# EAGLE board button_breakout_v1.1 (EAGLE 9.6.2)
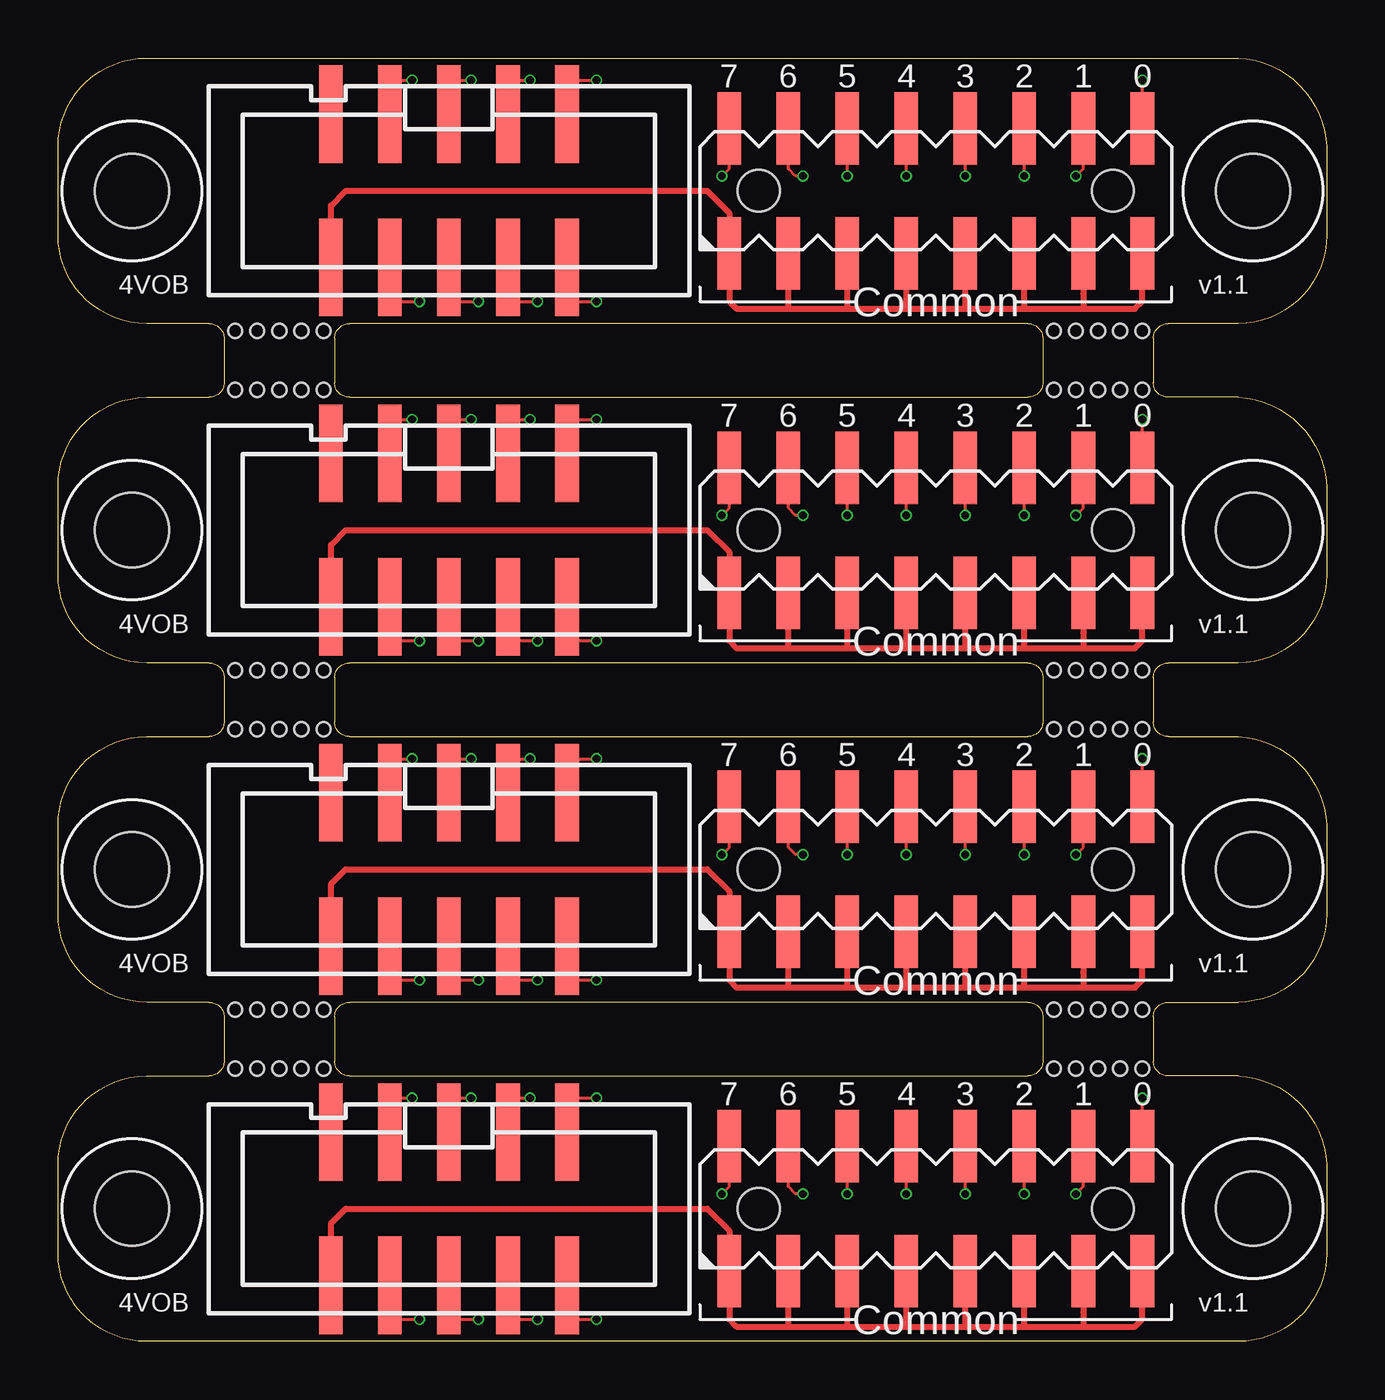
[diagram p0: board, top side]
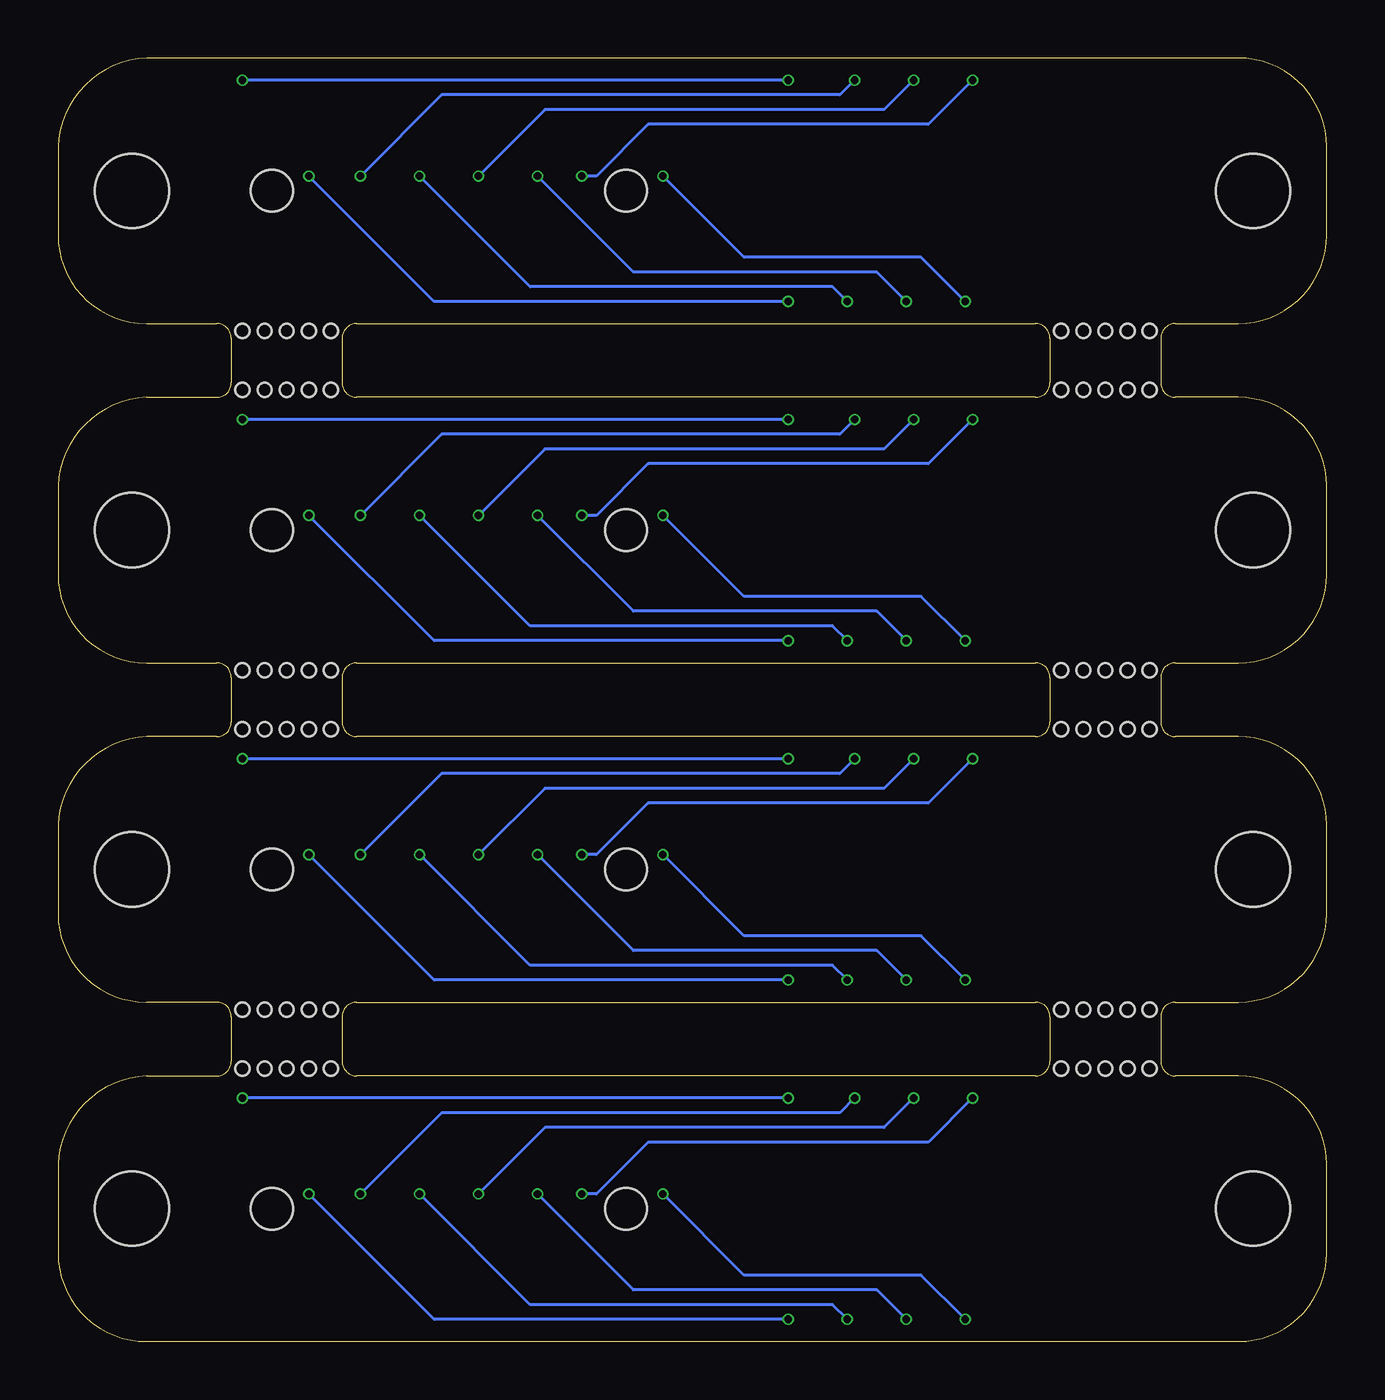
[diagram p1: board, bottom side, seen from below]

Size 54.61 x 55.24 mm. Coordinates in mm from the lower left corner, seen from the top.
Outline: 0,7.62 arc-90 3.81,11.43 6.51,11.43 arc90 7.14,12.06 7.14,13.97 arc90 6.51,14.61 3.81,14.61 arc-90 0,18.42 0,22.23 arc-90 3.81,26.04 6.51,26.04 arc90 7.14,26.67 7.14,28.58 arc90 6.51,29.21 3.81,29.21 arc-90 0,33.02 0,36.83 arc-90 3.81,40.64 6.51,40.64 arc90 7.14,41.27 7.14,43.18 arc90 6.51,43.81 3.81,43.81 arc-90 0,47.62 0,51.43 arc-90 3.81,55.24 50.8,55.24 arc-85 54.61,51.43 54.61,47.62 arc-90 50.8,43.81 47.78,43.81 arc90 47.15,43.18 47.15,41.27 arc90 47.78,40.64 50.8,40.64 arc-85 54.61,36.83 54.61,33.02 arc-90 50.8,29.21 47.78,29.21 arc90 47.15,28.58 47.15,26.67 arc90 47.78,26.04 50.8,26.04 arc-85 54.61,22.23 54.61,18.42 arc-90 50.8,14.61 47.78,14.61 arc90 47.15,13.97 47.15,12.06 arc90 47.78,11.43 50.8,11.43 arc-85 54.61,7.62 54.61,3.81 arc-90 50.8,0 3.81,0 arc-90 0,3.81 0,7.62
Outline: 42.39,12.06 arc-90 41.75,11.43 12.54,11.43 arc-90 11.91,12.06 11.91,13.97 arc-90 12.54,14.61 41.75,14.61 arc-90 42.39,13.97 42.39,12.06
Outline: 42.39,26.67 arc-90 41.75,26.04 12.54,26.04 arc-90 11.91,26.67 11.91,28.58 arc-90 12.54,29.21 41.75,29.21 arc-90 42.39,28.58 42.39,26.67
Outline: 42.39,41.27 arc-90 41.75,40.64 12.54,40.64 arc-90 11.91,41.27 11.91,43.18 arc-90 12.54,43.81 41.75,43.81 arc-90 42.39,43.18 42.39,41.27
Copper layers (1*16): Top 0.035mm / dielectric 1.6mm / Bottom 0.035mm
Design rules "jlcpcb-2layers": minimum track width 5mil, minimum drill 0.3mm, track to track 5mil, track to pad 5mil, pad to pad 5mil, via to via 5mil, smd to smd 5mil, copper to edge 0.2mm, drill to drill 6mil, minimum pad ring 10mil, minimum via ring 3mil, stop-mask expansion 4mil, vias tented up to drill 0mil, thermal gap 10mil
Holes 3.2 mm at 3.17,5.71 51.44,5.71 3.17,20.32 51.44,20.32 3.17,34.92 51.44,34.92 3.17,49.53 51.44,49.53
Holes 0.6 mm at 46.67,11.75 45.72,11.75 44.77,11.75 43.82,11.75 42.86,11.75 42.86,14.29 43.82,14.29 44.77,14.29 45.72,14.29 46.67,14.29 11.43,11.75 10.48,11.75 9.53,11.75 8.57,11.75 7.62,11.75 7.62,14.29 8.57,14.29 9.53,14.29 10.48,14.29 11.43,14.29 46.67,26.35 45.72,26.35 44.77,26.35 43.82,26.35 42.86,26.35 42.86,28.89 43.82,28.89 44.77,28.89 45.72,28.89 46.67,28.89 11.43,26.35 10.48,26.35 9.53,26.35 8.57,26.35 7.62,26.35 7.62,28.89 8.57,28.89 9.53,28.89 10.48,28.89 11.43,28.89 46.67,40.96 45.72,40.96 44.77,40.96 43.82,40.96 42.86,40.96 42.86,43.5 43.82,43.5 44.77,43.5 45.72,43.5 46.67,43.5 11.43,40.96 10.48,40.96 9.53,40.96 8.57,40.96 7.62,40.96 7.62,43.5 8.57,43.5 9.53,43.5 10.48,43.5 11.43,43.5

## Footprints (pad centres in the part's own frame; a part is rotated, then mirrored left to right if it is on the bottom)
CONN-IDC10P-SMD = smd 1.02 x 4.2: P$1 -5.08,-3.3; P$2 -5.08,3.3; P$3 -2.54,-3.3; P$4 -2.54,3.3; P$5 0,-3.3; P$6 0,3.3; P$7 2.54,-3.3; P$8 2.54,3.3; P$9 5.08,-3.3; P$10 5.08,3.3
MA08-2-SMDJ = smd 1.02 x 3.12: P$1 -8.89,-2.69; P$2 -8.89,2.69; P$3 -6.35,-2.69; P$4 -6.35,2.69; P$5 -3.81,-2.69; P$6 -3.81,2.69; P$7 -1.27,-2.69; P$8 -1.27,2.69; P$9 1.27,-2.69; P$10 1.27,2.69; P$11 3.81,-2.69; P$12 3.81,2.69; P$13 6.35,-2.69; P$14 6.35,2.69; P$15 8.89,-2.69; P$16 8.89,2.69 | hole 1.8: -7.62,0; 7.62,0

## Placement (x,y rotation side)
IDC  CONN-IDC-10PSMD  [CONN-IDC10P-SMD]  16.83,5.71 180 top
IDC1  CONN-IDC-10PSMD  [CONN-IDC10P-SMD]  16.83,20.32 180 top
IDC2  CONN-IDC-10PSMD  [CONN-IDC10P-SMD]  16.83,34.92 180 top
IDC3  CONN-IDC-10PSMD  [CONN-IDC10P-SMD]  16.83,49.53 180 top
X1  [MA08-2-SMDJ]  37.78,5.71 0 top
X2  [MA08-2-SMDJ]  37.78,20.32 0 top
X3  [MA08-2-SMDJ]  37.78,34.92 0 top
X4  [MA08-2-SMDJ]  37.78,49.53 0 top

## Library data of the parts
IDC IDC1-IDC3 X1-X4 = joakim

## Nets
COL0: IDC.P$1 X1.P$16
COL1: IDC.P$2 X1.P$14
COL2: IDC.P$3 X1.P$12
COL3: IDC.P$4 X1.P$10
COL4: IDC.P$5 X1.P$8
COL5: IDC.P$6 X1.P$6
COL6: IDC.P$7 X1.P$4
COL7: IDC.P$8 X1.P$2
COL8: IDC1.P$2 X2.P$14
COL9: IDC1.P$3 X2.P$12
COL10: IDC1.P$4 X2.P$10
COL11: IDC1.P$5 X2.P$8
COL12: IDC1.P$6 X2.P$6
COL13: IDC1.P$7 X2.P$4
COL14: IDC1.P$8 X2.P$2
COL15: IDC1.P$1 X2.P$16
COL16: IDC2.P$2 X3.P$14
COL17: IDC2.P$3 X3.P$12
COL18: IDC2.P$4 X3.P$10
COL19: IDC2.P$5 X3.P$8
COL20: IDC2.P$6 X3.P$6
COL21: IDC2.P$7 X3.P$4
COL22: IDC2.P$8 X3.P$2
COL23: IDC2.P$1 X3.P$16
COL24: IDC3.P$2 X4.P$14
COL25: IDC3.P$3 X4.P$12
COL26: IDC3.P$4 X4.P$10
COL27: IDC3.P$5 X4.P$8
COL28: IDC3.P$6 X4.P$6
COL29: IDC3.P$7 X4.P$4
COL30: IDC3.P$8 X4.P$2
COL31: IDC3.P$1 X4.P$16
ROW0: IDC.P$10 X1.P$1 X1.P$3 X1.P$5 X1.P$7 X1.P$9 X1.P$11 X1.P$13 X1.P$15
ROW1: IDC1.P$10 X2.P$1 X2.P$3 X2.P$5 X2.P$7 X2.P$9 X2.P$11 X2.P$13 X2.P$15
ROW2: IDC2.P$10 X3.P$1 X3.P$3 X3.P$5 X3.P$7 X3.P$9 X3.P$11 X3.P$13 X3.P$15
ROW3: IDC3.P$10 X4.P$1 X4.P$3 X4.P$5 X4.P$7 X4.P$9 X4.P$11 X4.P$13 X4.P$15

## Tracks (layer width: path | path; a pad name or v marks a point on that pad's centre or on a via)
COL0  (via drill 0.33)
  Top 0.127: IDC.P$1 21.91,10.48 v23.18,10.48 | X1.P$16 v46.67,10.48
  Bottom 0.127: v23.18,10.48 v46.67,10.48
COL1  (via drill 0.33)
  Top 0.127: IDC.P$2 22.22,2.1 22.22,0.95 v23.18,0.95 | v43.82,6.35 44.13,6.67 X1.P$14
  Bottom 0.127: v23.18,0.95 38.42,0.95 v43.82,6.35
COL2  (via drill 0.33)
  Top 0.127: IDC.P$3 19.37,10.48 v20.32,10.48 | v41.59,6.35 X1.P$12
  Bottom 0.127: v20.32,10.48 20.95,9.84 38.1,9.84 v41.59,6.35
COL3  (via drill 0.33)
  Top 0.127: IDC.P$4 19.37,0.95 v20.64,0.95 | v39.05,6.35 X1.P$10
  Bottom 0.127: v20.64,0.95 21.27,1.59 34.29,1.59 v39.05,6.35
COL4  (via drill 0.33)
  Top 0.127: IDC.P$5 16.83,10.48 v17.78,10.48 | v36.51,6.35 X1.P$8
  Bottom 0.127: v17.78,10.48 19.05,9.21 33.65,9.21 v36.51,6.35
COL5  (via drill 0.33)
  Top 0.127: IDC.P$6 16.83,0.95 v18.1,0.95 | v33.97,6.35 X1.P$6
  Bottom 0.127: v18.1,0.95 19.37,2.22 29.84,2.22 v33.97,6.35
COL6  (via drill 0.33)
  Top 0.127: IDC.P$7 14.29,10.48 v15.24,10.48 | v32.07,6.35 31.75,6.35 31.43,6.67 X1.P$4
  Bottom 0.127: v15.24,10.48 17.15,8.57 29.21,8.57 31.43,6.35 v32.07,6.35
COL7  (via drill 0.33)
  Top 0.127: IDC.P$8 14.29,0.95 v15.56,0.95 | v28.58,6.35 28.89,6.67 X1.P$2
  Bottom 0.127: v15.56,0.95 17.46,2.86 25.08,2.86 v28.58,6.35
COL8  (via drill 0.33)
  Top 0.127: IDC1.P$2 22.22,16.7 22.22,15.56 v23.18,15.56 | v43.82,20.96 44.13,21.27 X2.P$14
  Bottom 0.127: v23.18,15.56 38.42,15.56 v43.82,20.96
COL9  (via drill 0.33)
  Top 0.127: IDC1.P$3 19.37,25.08 v20.32,25.08 | v41.59,20.96 X2.P$12
  Bottom 0.127: v20.32,25.08 20.95,24.45 38.1,24.45 v41.59,20.96
COL10  (via drill 0.33)
  Top 0.127: IDC1.P$4 19.37,15.56 v20.64,15.56 | v39.05,20.96 X2.P$10
  Bottom 0.127: v20.64,15.56 21.27,16.19 34.29,16.19 v39.05,20.96
COL11  (via drill 0.33)
  Top 0.127: IDC1.P$5 16.83,25.08 v17.78,25.08 | v36.51,20.96 X2.P$8
  Bottom 0.127: v17.78,25.08 19.05,23.81 33.65,23.81 v36.51,20.96
COL12  (via drill 0.33)
  Top 0.127: IDC1.P$6 16.83,15.56 v18.1,15.56 | v33.97,20.96 X2.P$6
  Bottom 0.127: v18.1,15.56 19.37,16.83 29.84,16.83 v33.97,20.96
COL13  (via drill 0.33)
  Top 0.127: IDC1.P$7 14.29,25.08 v15.24,25.08 | v32.07,20.96 31.75,20.96 31.43,21.27 X2.P$4
  Bottom 0.127: v15.24,25.08 17.15,23.18 29.21,23.18 31.43,20.96 v32.07,20.96
COL14  (via drill 0.33)
  Top 0.127: IDC1.P$8 14.29,15.56 v15.56,15.56 | v28.58,20.96 28.89,21.27 X2.P$2
  Bottom 0.127: v15.56,15.56 17.46,17.46 25.08,17.46 v28.58,20.96
COL15  (via drill 0.33)
  Top 0.127: IDC1.P$1 21.91,25.08 v23.18,25.08 | X2.P$16 v46.67,25.08
  Bottom 0.127: v23.18,25.08 v46.67,25.08
COL16  (via drill 0.33)
  Top 0.127: IDC2.P$2 22.22,31.31 22.22,30.16 v23.18,30.16 | v43.82,35.56 44.13,35.88 X3.P$14
  Bottom 0.127: v23.18,30.16 38.42,30.16 v43.82,35.56
COL17  (via drill 0.33)
  Top 0.127: IDC2.P$3 19.37,39.69 v20.32,39.69 | v41.59,35.56 X3.P$12
  Bottom 0.127: v20.32,39.69 20.95,39.05 38.1,39.05 v41.59,35.56
COL18  (via drill 0.33)
  Top 0.127: IDC2.P$4 19.37,30.16 v20.64,30.16 | v39.05,35.56 X3.P$10
  Bottom 0.127: v20.64,30.16 21.27,30.8 34.29,30.8 v39.05,35.56
COL19  (via drill 0.33)
  Top 0.127: IDC2.P$5 16.83,39.69 v17.78,39.69 | v36.51,35.56 X3.P$8
  Bottom 0.127: v17.78,39.69 19.05,38.42 33.65,38.42 v36.51,35.56
COL20  (via drill 0.33)
  Top 0.127: IDC2.P$6 16.83,30.16 v18.1,30.16 | v33.97,35.56 X3.P$6
  Bottom 0.127: v18.1,30.16 19.37,31.43 29.84,31.43 v33.97,35.56
COL21  (via drill 0.33)
  Top 0.127: IDC2.P$7 14.29,39.69 v15.24,39.69 | v32.07,35.56 31.75,35.56 31.43,35.88 X3.P$4
  Bottom 0.127: v15.24,39.69 17.15,37.78 29.21,37.78 31.43,35.56 v32.07,35.56
COL22  (via drill 0.33)
  Top 0.127: IDC2.P$8 14.29,30.16 v15.56,30.16 | v28.58,35.56 28.89,35.88 X3.P$2
  Bottom 0.127: v15.56,30.16 17.46,32.07 25.08,32.07 v28.58,35.56
COL23  (via drill 0.33)
  Top 0.127: IDC2.P$1 21.91,39.69 v23.18,39.69 | X3.P$16 v46.67,39.69
  Bottom 0.127: v23.18,39.69 v46.67,39.69
COL24  (via drill 0.33)
  Top 0.127: IDC3.P$2 22.22,45.91 22.22,44.77 v23.18,44.77 | v43.82,50.16 44.13,50.48 X4.P$14
  Bottom 0.127: v23.18,44.77 38.42,44.77 v43.82,50.16
COL25  (via drill 0.33)
  Top 0.127: IDC3.P$3 19.37,54.29 v20.32,54.29 | v41.59,50.16 X4.P$12
  Bottom 0.127: v20.32,54.29 20.95,53.66 38.1,53.66 v41.59,50.16
COL26  (via drill 0.33)
  Top 0.127: IDC3.P$4 19.37,44.77 v20.64,44.77 | v39.05,50.16 X4.P$10
  Bottom 0.127: v20.64,44.77 21.27,45.4 34.29,45.4 v39.05,50.16
COL27  (via drill 0.33)
  Top 0.127: IDC3.P$5 16.83,54.29 v17.78,54.29 | v36.51,50.16 X4.P$8
  Bottom 0.127: v17.78,54.29 19.05,53.02 33.65,53.02 v36.51,50.16
COL28  (via drill 0.33)
  Top 0.127: IDC3.P$6 16.83,44.77 v18.1,44.77 | v33.97,50.16 X4.P$6
  Bottom 0.127: v18.1,44.77 19.37,46.04 29.84,46.04 v33.97,50.16
COL29  (via drill 0.33)
  Top 0.127: IDC3.P$7 14.29,54.29 v15.24,54.29 | v32.07,50.16 31.75,50.16 31.43,50.48 X4.P$4
  Bottom 0.127: v15.24,54.29 17.15,52.39 29.21,52.39 31.43,50.16 v32.07,50.16
COL30  (via drill 0.33)
  Top 0.127: IDC3.P$8 14.29,44.77 v15.56,44.77 | v28.58,50.16 28.89,50.48 X4.P$2
  Bottom 0.127: v15.56,44.77 17.46,46.67 25.08,46.67 v28.58,50.16
COL31  (via drill 0.33)
  Top 0.127: IDC3.P$1 21.91,54.29 v23.18,54.29 | X4.P$16 v46.67,54.29
  Bottom 0.127: v23.18,54.29 v46.67,54.29
ROW0
  Top 0.127: X1.P$1 28.89,4.45
  Top 0.254: IDC.P$10 11.75,5.08 12.38,5.71 27.94,5.71 28.89,4.76 28.89,4.45 28.89,0.95 29.21,0.64 31.43,0.64 | 31.43,0.64 33.97,0.64 | 33.97,0.64 36.51,0.64 | 36.51,0.64 39.05,0.64 | 39.05,0.64 41.59,0.64 | 41.59,0.64 44.13,0.64 | 44.13,0.64 46.36,0.64 46.67,0.95 X1.P$15 | 44.13,0.64 44.13,1.27 44.13,2.54 X1.P$13 | 41.59,0.64 X1.P$11 | 39.05,0.64 X1.P$9 | 36.51,0.64 X1.P$7 | 33.97,0.64 X1.P$5 | 31.43,0.64 X1.P$3
ROW1
  Top 0.127: X2.P$1 28.89,19.05
  Top 0.254: IDC1.P$10 11.75,19.69 12.38,20.32 27.94,20.32 28.89,19.37 28.89,19.05 28.89,15.56 29.21,15.24 31.43,15.24 | 31.43,15.24 33.97,15.24 | 33.97,15.24 36.51,15.24 | 36.51,15.24 39.05,15.24 | 39.05,15.24 41.59,15.24 | 41.59,15.24 44.13,15.24 | 44.13,15.24 46.36,15.24 46.67,15.56 X2.P$15 | 44.13,15.24 44.13,15.88 44.13,17.15 X2.P$13 | 41.59,15.24 X2.P$11 | 39.05,15.24 X2.P$9 | 36.51,15.24 X2.P$7 | 33.97,15.24 X2.P$5 | 31.43,15.24 X2.P$3
ROW2
  Top 0.127: X3.P$1 28.89,33.66
  Top 0.254: IDC2.P$10 11.75,34.29 12.38,34.92 27.94,34.92 28.89,33.97 28.89,33.66 28.89,30.16 29.21,29.85 31.43,29.85 | 31.43,29.85 33.97,29.85 | 33.97,29.85 36.51,29.85 | 36.51,29.85 39.05,29.85 | 39.05,29.85 41.59,29.85 | 41.59,29.85 44.13,29.85 | 44.13,29.85 46.36,29.85 46.67,30.16 X3.P$15 | 44.13,29.85 44.13,30.48 44.13,31.75 X3.P$13 | 41.59,29.85 X3.P$11 | 39.05,29.85 X3.P$9 | 36.51,29.85 X3.P$7 | 33.97,29.85 X3.P$5 | 31.43,29.85 X3.P$3
ROW3
  Top 0.127: X4.P$1 28.89,48.26
  Top 0.254: IDC3.P$10 11.75,48.89 12.38,49.53 27.94,49.53 28.89,48.58 28.89,48.26 28.89,44.77 29.21,44.45 31.43,44.45 | 31.43,44.45 33.97,44.45 | 33.97,44.45 36.51,44.45 | 36.51,44.45 39.05,44.45 | 39.05,44.45 41.59,44.45 | 41.59,44.45 44.13,44.45 | 44.13,44.45 46.36,44.45 46.67,44.77 X4.P$15 | 44.13,44.45 44.13,45.09 44.13,46.35 X4.P$13 | 41.59,44.45 X4.P$11 | 39.05,44.45 X4.P$9 | 36.51,44.45 X4.P$7 | 33.97,44.45 X4.P$5 | 31.43,44.45 X4.P$3

## Text on the board
tNames: 7 | 6 | 5 | 4 | 3 | 2 | 1 | 0 | 4VOB | v1.1 | Common | 7 | 6 | 5 | 4 | 3 | 2 | 1 | 0 | 4VOB | v1.1 | Common | 7 | 6 | 5 | 4 | 3 | 2 | 1 | 0 | 4VOB | v1.1 | Common | 7 | 6 | 5 | 4 | 3 | 2 | 1 | 0 | 4VOB | v1.1 | Common